# Altium PCB JacdacBrainRP2040 59.PcbDoc (part 1 of 2)
Units mm, origin at the board's own origin, x right, y up, seen from the top; angles counter-clockwise.
Board outline 24 x 39.85 mm, 2 copper layers (Top Layer, Bottom Layer), stack 1.525 mm thick; 58 components, 45 nets, 236 pads, 56 vias.
Unrouted connection lines stored in the file: 43.
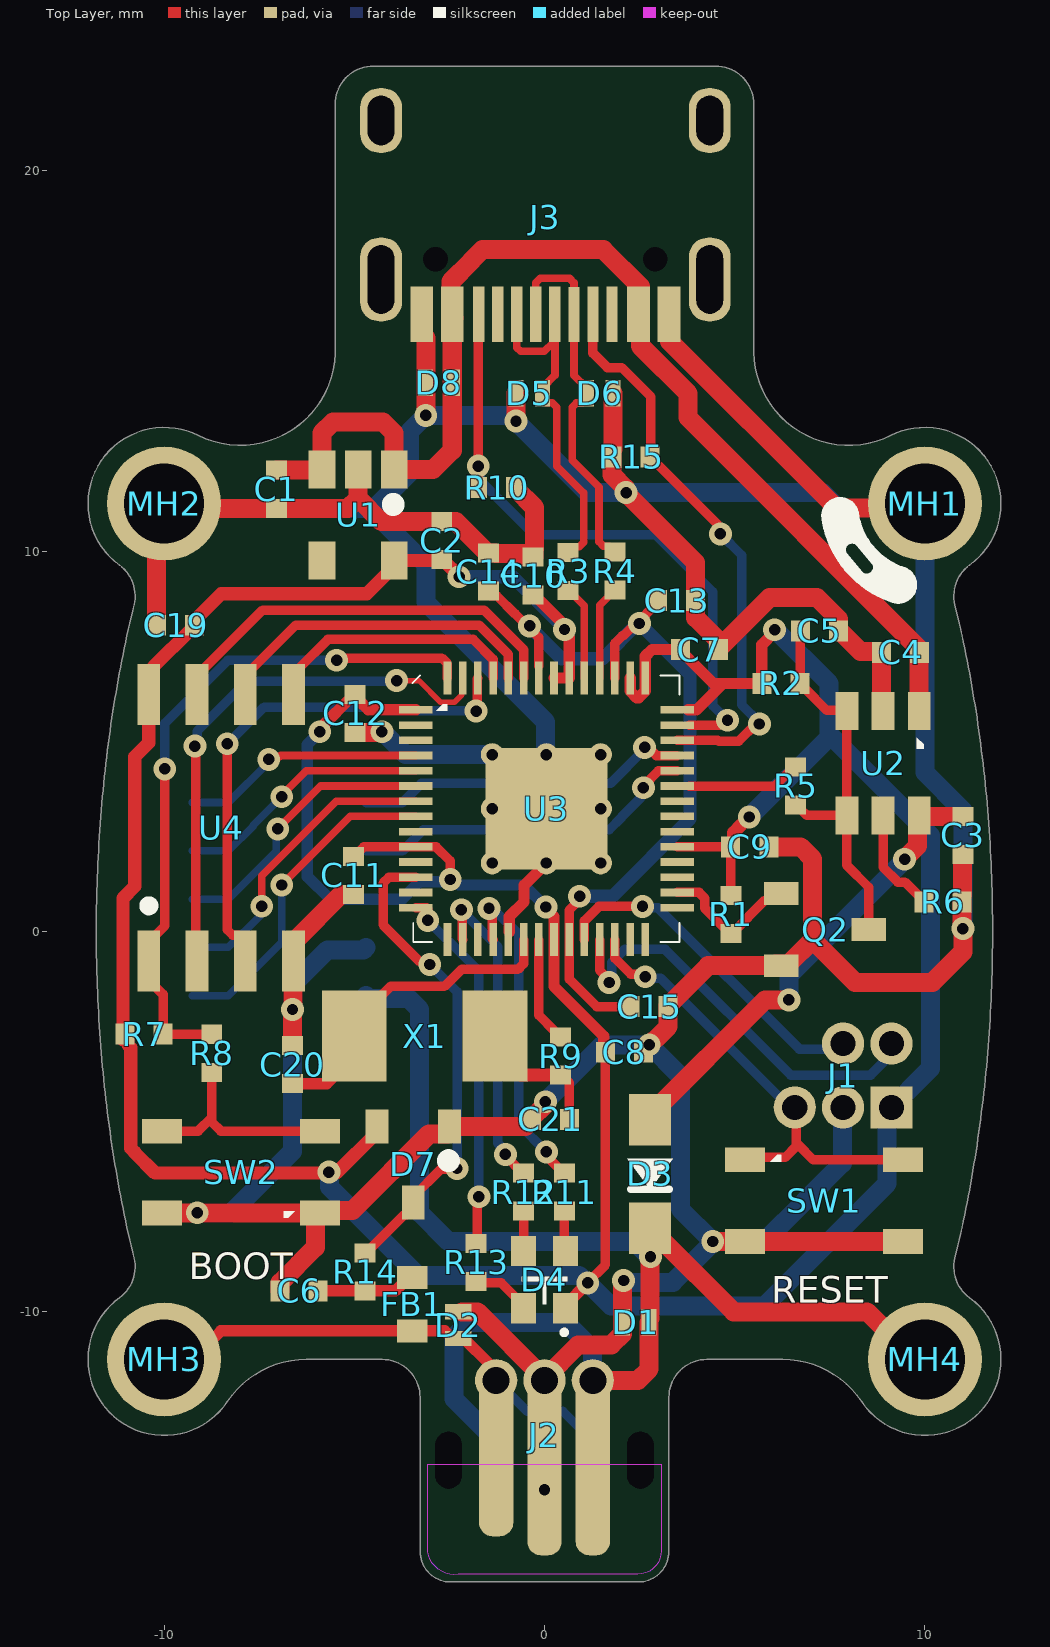
[diagram p0: Top Layer view]
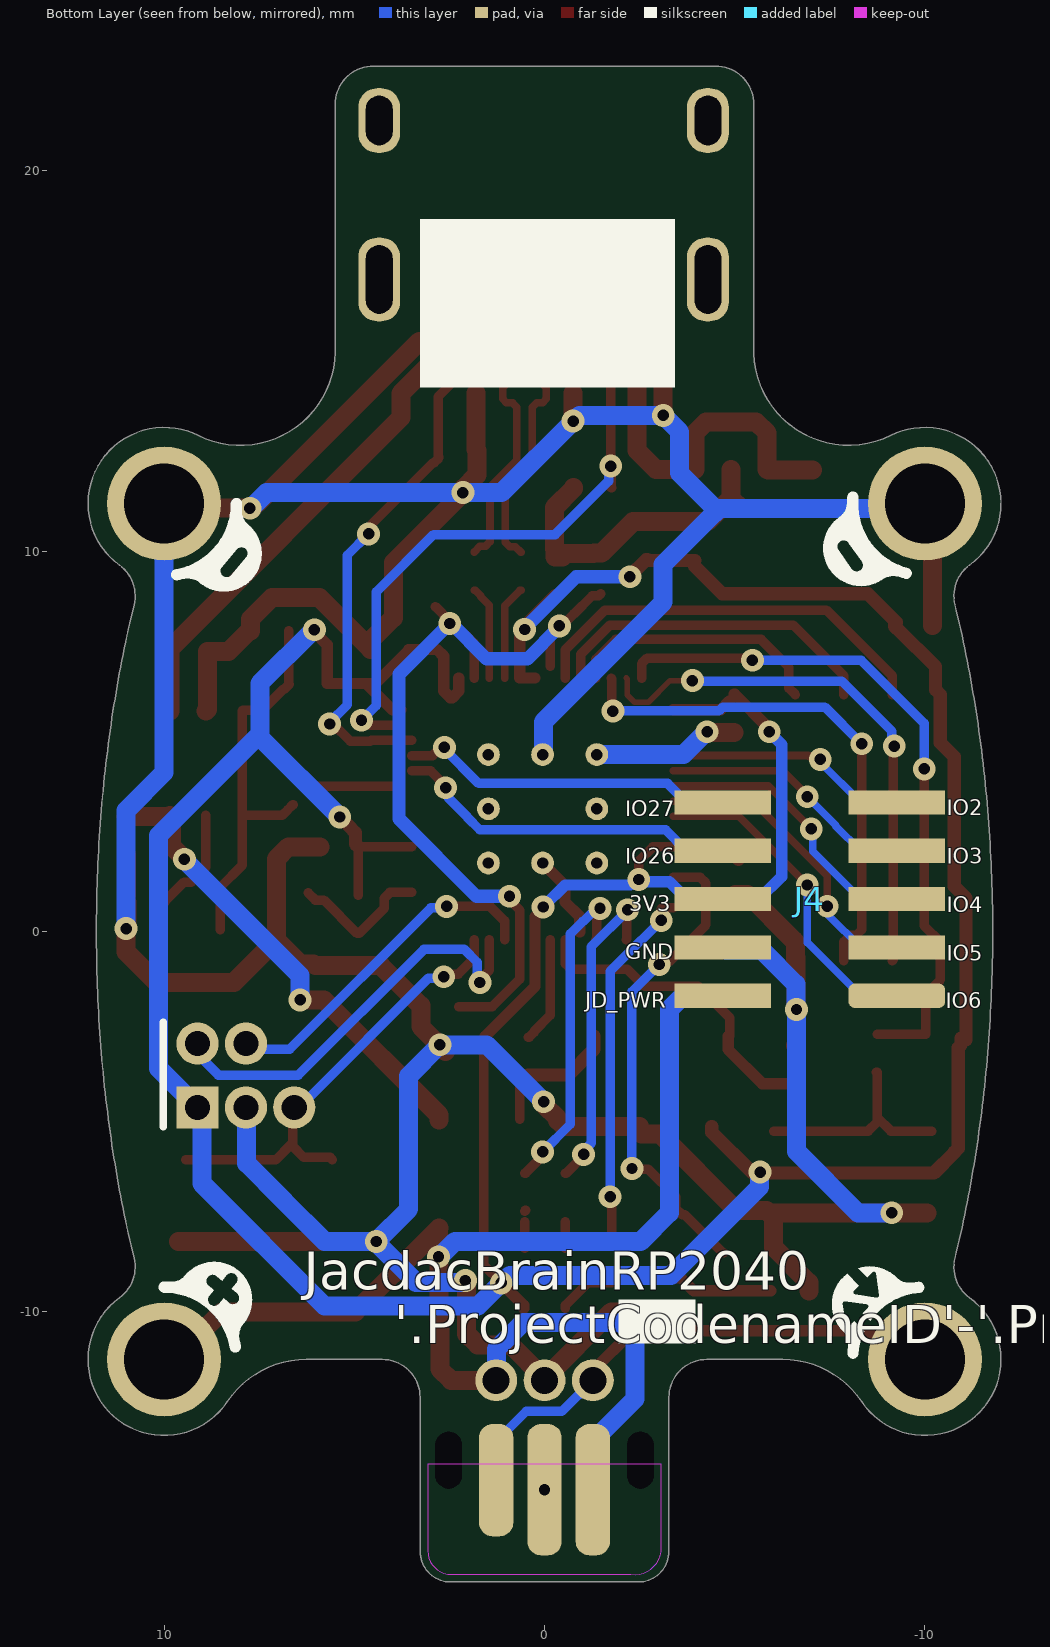
[diagram p1: Bottom Layer view, seen from below]

## Layer stack, top to bottom
Top Solder: solder mask 0.0102, Solder Resist, Dk 3.5
Top Layer: signal copper 0.0356
Dielectric 1: core 1.454, FR-4, Dk 4.2
Bottom Layer: signal copper 0.0356
Bottom Solder: solder mask 0.0102, Solder Resist, Dk 3.5

## Board outline
-11.636,-3.366 -11.65,-3.19 -11.664,-3.014 -11.678,-2.839 -11.69,-2.662 -11.702,-2.486 -11.713,-2.309 -11.723,-2.132 -11.732,-1.955 -11.74,-1.778 -11.748,-1.601 -11.755,-1.423 -11.761,-1.246 -11.766,-1.068 -11.771,-0.89 -11.777,-0.534 -11.779,-0.356 -11.78,-0.178 -11.781,0 -11.78,0.178 -11.779,0.356 -11.777,0.534 -11.771,0.89 -11.766,1.068 -11.761,1.246 -11.755,1.423 -11.748,1.601 -11.74,1.778 -11.732,1.955 -11.723,2.132 -11.713,2.309 -11.702,2.486 -11.69,2.662 -11.678,2.839 -11.664,3.014 -11.65,3.19 -11.636,3.366 -11.62,3.541 -11.603,3.716 -11.586,3.89 -11.568,4.064 -11.549,4.238 -11.53,4.411 -11.509,4.585 -11.488,4.757 -11.466,4.929 -11.444,5.101 -11.42,5.273 -11.396,5.444 -11.371,5.614 -11.345,5.784 -11.318,5.953 -11.291,6.122 -11.263,6.291 -11.234,6.459 -11.204,6.626 -11.174,6.793 -11.143,6.959 -11.111,7.124 -11.078,7.289 -11.045,7.453 -11.011,7.617 -10.976,7.78 -10.94,7.942 -10.904,8.104 -10.867,8.265 -10.829,8.425 -10.791,8.584 ccw(c-11.76,8.823) -11.175,9.631 cw(c-10,11.25) -9.875,13.246 ccw(c-9.803,14.281) -9.865,13.245 cw(c-10,11.25) -9.111,13.041 ccw(c-7.999,15.281) -5.5,15.2 ccw(c-7.439,15.229) -5.5,15.228 -5.5,21.75 cw(c-4.5,21.75) -4.5,22.75 4.5,22.75 cw(c4.5,21.75) 5.5,21.75 5.5,15.228 ccw(c7.999,15.281) 9.111,13.041 cw(c10,11.25) 9.865,13.245 ccw(c9.803,14.279) 9.875,13.246 cw(c10,11.25) 11.175,9.631 ccw(c11.76,8.823) 10.791,8.584 10.829,8.425 10.867,8.265 10.904,8.104 10.94,7.942 10.976,7.78 11.011,7.617 11.045,7.453 11.078,7.289 11.111,7.124 11.143,6.959 11.174,6.793 11.204,6.626 11.234,6.459 11.263,6.291 11.291,6.122 11.318,5.953 11.345,5.784 11.371,5.614 11.396,5.444 11.42,5.273 11.444,5.101 11.466,4.929 11.488,4.757 11.509,4.585 11.53,4.411 11.549,4.238 11.568,4.064 11.586,3.89 11.603,3.716 11.62,3.541 11.635,3.366 11.65,3.19 11.664,3.014 11.678,2.839 11.69,2.662 11.702,2.486 11.713,2.309 11.723,2.132 11.732,1.955 11.74,1.778 11.748,1.601 11.755,1.423 11.761,1.246 11.766,1.068 11.771,0.89 11.777,0.534 11.779,0.356 11.78,0.178 11.781,0 11.78,-0.178 11.779,-0.356 11.777,-0.534 11.771,-0.89 11.766,-1.068 11.761,-1.246 11.755,-1.423 11.748,-1.601 11.74,-1.778 11.732,-1.955 11.723,-2.132 11.713,-2.309 11.702,-2.486 11.69,-2.662 11.678,-2.839 11.664,-3.014 11.65,-3.19 11.635,-3.366 11.62,-3.541 11.603,-3.716 11.586,-3.89 11.568,-4.064 11.549,-4.238 11.53,-4.411 11.509,-4.585 11.488,-4.757 11.466,-4.929 11.444,-5.101 11.42,-5.273 11.396,-5.444 11.371,-5.614 11.345,-5.784 11.318,-5.953 11.291,-6.122 11.263,-6.291 11.234,-6.459 11.204,-6.626 11.174,-6.793 11.143,-6.959 11.111,-7.124 11.078,-7.289 11.045,-7.453 11.011,-7.617 10.976,-7.78 10.94,-7.942 10.904,-8.104 10.867,-8.265 10.829,-8.425 10.791,-8.584 ccw(c11.76,-8.823) 11.175,-9.631 cw(c10,-11.25) 8.337,-12.361 ccw(c6.258,-13.75) 6.258,-11.25 4.27,-11.25 ccw(c4.27,-12.25) 3.27,-12.25 3.27,-16.301 cw(c2.471,-16.301) 2.471,-17.1 -2.471,-17.1 cw(c-2.471,-16.301) -3.27,-16.301 -3.27,-12.25 ccw(c-4.27,-12.25) -4.27,-11.25 -6.258,-11.25 ccw(c-6.258,-13.75) -8.337,-12.361 cw(c-10,-11.249) -11.993,-11.082 cw(c-9.995,-11.253) -11.175,-9.631 ccw(c-11.76,-8.823) -10.791,-8.584 -10.829,-8.425 -10.867,-8.265 -10.904,-8.104 -10.94,-7.942 -10.976,-7.78 -11.011,-7.617 -11.045,-7.453 -11.078,-7.289 -11.111,-7.124 -11.143,-6.959 -11.174,-6.793 -11.204,-6.626 -11.234,-6.459 -11.263,-6.291 -11.291,-6.122 -11.318,-5.953 -11.345,-5.784 -11.371,-5.614 -11.396,-5.444 -11.42,-5.273 -11.444,-5.101 -11.466,-4.929 -11.488,-4.757 -11.509,-4.585 -11.53,-4.411 -11.549,-4.238 -11.568,-4.064 -11.586,-3.89 -11.603,-3.716 -11.62,-3.541

## Design rules (kind name [scope] priority, off if disabled: settings)
AssemblyTestPointUsage [All] p1: valid=2
BoardOutlineClearance [All] p1: gap=0.3 ignorepadtopadclearanceinfootprint=FALSE except(0: Arc-SplitContinuation Track-SplitContinuation SMDPad-SplitContinuation THPad-SplitContinuation Via-SplitContinuation Fill-SplitContinuation Poly-SplitContinuation Region-OutlineEdge Region-SplitContinuation Text-OutlineEdge Text-SplitContinuation; 0.25: THPad-OutlineEdge Poly-OutlineEdge)
Clearance [All] p1: gap=0.125 ignorepadtopadclearanceinfootprint=FALSE except(0: Arc-Hole Track-Hole SMDPad-Hole THPad-Hole Via-Hole Fill-Hole Poly-Hole Region-Hole Text-Hole)
ComponentClearance SpecialComponentClearance [InComponent('MH1') or InComponent('MH2')  or InComponent('MH3')  or InComponent('MH4') vs InComponent('J3') or InComponent('J4')  or InComponent('J6')  or InComponent('J7') or InComponent('J2') or InComponent('MH2') or InComponent('J1')] p1: gap=0 collisioncheckmode=3 verticalgap=0 showdistances=FALSE
ComponentClearance [All] p2: gap=0.2 collisioncheckmode=3 verticalgap=0.2 showdistances=FALSE
DiffPairsRouting DiffPair_DIFF90DiffPairsRouting [InDifferentialPairClass('DIFF90')] p1: maxlimit=2 minlimit=0.2 mostfreqgap=0.2 toplayer_minwidth=0.2 toplayer_maxwidth=2 toplayer_prefwidth=0.2 bottomlayer_minwidth=0.2 bottomlayer_maxwidth=2 bottomlayer_prefwidth=0.2 substack1={CB9D278B-8BF5-444A-AAF4-837A2A9DF42D} toplayer_{cb9d278b-8bf5-444a-aaf4-837a2a9df42d}_minwidth=0.381 toplayer_{cb9d278b-8bf5-444a-aaf4-837a2a9df42d}_maxwidth=0.381 toplayer_{cb9d278b-8bf5-444a-aaf4-837a2a9df42d}_prefwidth=0.381 bottomlayer_{cb9d278b-8bf5-444a-aaf4-837a2a9df42d}_minwidth=0.381 bottomlayer_{cb9d278b-8bf5-444a-aaf4-837a2a9df42d}_maxwidth=0.381 bottomlayer_{cb9d278b-8bf5-444a-aaf4-837a2a9df42d}_prefwidth=0.381 substack2={826B8647-A721-4255-895A-19F9591B9CD1} toplayer_{826b8647-a721-4255-895a-19f9591b9cd1}_minwidth=0.381 toplayer_{826b8647-a721-4255-895a-19f9591b9cd1}_maxwidth=0.381 toplayer_{826b8647-a721-4255-895a-19f9591b9cd1}_prefwidth=0.381 bottomlayer_{826b8647-a721-4255-895a-19f9591b9cd1}_minwidth=0.381 bottomlayer_{826b8647-a721-4255-895a-19f9591b9cd1}_maxwidth=0.381 bottomlayer_{826b8647-a721-4255-895a-19f9591b9cd1}_prefwidth=0.381 substack3={E64FCAF4-1BC8-437D-B1E0-0E5F2DC0F59E} toplayer_{e64fcaf4-1bc8-437d-b1e0-0e5f2dc0f59e}_minwidth=0.381 toplayer_{e64fcaf4-1bc8-437d-b1e0-0e5f2dc0f59e}_maxwidth=0.381 toplayer_{e64fcaf4-1bc8-437d-b1e0-0e5f2dc0f59e}_prefwidth=0.381 bottomlayer_{e64fcaf4-1bc8-437d-b1e0-0e5f2dc0f59e}_minwidth=0.381 bottomlayer_{e64fcaf4-1bc8-437d-b1e0-0e5f2dc0f59e}_maxwidth=0.381 bottomlayer_{e64fcaf4-1bc8-437d-b1e0-0e5f2dc0f59e}_prefwidth=0.381 substack4={E61CE66C-507C-4E1E-8E83-C905434AFC1C} toplayer_{e61ce66c-507c-4e1e-8e83-c905434afc1c}_minwidth=0.381 toplayer_{e61ce66c-507c-4e1e-8e83-c905434afc1c}_maxwidth=0.381 toplayer_{e61ce66c-507c-4e1e-8e83-c905434afc1c}_prefwidth=0.381 bottomlayer_{e61ce66c-507c-4e1e-8e83-c905434afc1c}_minwidth=0.381 bottomlayer_{e61ce66c-507c-4e1e-8e83-c905434afc1c}_maxwidth=0.381 bottomlayer_{e61ce66c-507c-4e1e-8e83-c905434afc1c}_prefwidth=0.381 filterlayerstackid={285EF71D-43CD-4455-94EE-AC1A71E951D2} maxuncoupledlength=12.7
FabricationTestPointUsage [All] p1: valid=2 allowmultiple=FALSE
HoleSize [All] p1: absolutevalues=TRUE maxlimit=2.54 minlimit=0.2 maxpercent=80.000 minpercent=20.000
MatchedLengths DiffPair_DIFF90MatchedLengths [InDifferentialPair ('USB_D')] p1: tolerance=25.4 checknetsindiffpair=FALSE checkdiffpairvsdiffpair=TRUE checkxsignals=TRUE checkothers=TRUE
MinimumSolderMaskSliver [All] p1: minsoldermaskwidth=0.005
PlaneClearance [All] p1: clearance=0.3
PlaneConnect [All] p1: planeconnectstyle=Relief reliefexpansion=0.5 reliefentries=4 reliefconductorwidth=0.2 reliefairgap=0.3
PolygonConnect "PolygonConnect GND" [isVIA] p1: connectstyle=Relief reliefconductorwidth=0.2 reliefentries=4 polygonreliefangle="90 Angle" airgapwidth=0.2
PolygonConnect [All] p2: connectstyle=Relief reliefconductorwidth=0.2 reliefentries=4 polygonreliefangle="90 Angle" airgapwidth=0.2
RoutingVias [All] p1: holewidth=0.3 width=0.6 viastyle="Through Hole" minholewidth=0.3 minwidth=0.6 maxholewidth=0.3 maxwidth=0.8
SilkToSilkClearance [All] p1: silktosilkclearance=0.001
SilkToSolderMaskClearance [IsPad] p1: minsilkscreentomaskgap=0.05 clearancetoexposedcopper=TRUE
SolderMaskExpansion [All] p1: expansion=0.075 istentingtop=FALSE
Width [All] p1: maxlimit=2 minlimit=0.15 preferedwidth=0.15 substack1={CB9D278B-8BF5-444A-AAF4-837A2A9DF42D} substack2={826B8647-A721-4255-895A-19F9591B9CD1} substack3={E64FCAF4-1BC8-437D-B1E0-0E5F2DC0F59E} substack4={E61CE66C-507C-4E1E-8E83-C905434AFC1C} minimp=50.000000 maximp=50.000000 favimp=50.000000
20 further rules are at their usual default settings.

## Classes and differential pairs
differential pair USB_D: +USB_D_P -USB_D_N
differential pair MCU_USB_D: +MCU_USB_D_P -MCU_USB_D_N

## Components (designator, comment, footprint, x,y, rotation, side; value= is the part's Value field where it differs from the comment)
C1 "CL05A105KP5NNNC" "C0402_0.55MM - without outline" -7.05,11.625 r90 top
C2 "CL05A105KP5NNNC" "C0402_0.55MM - without outline" -2.7,10.275 r270 top
C3 "CL05A475MP5NRNC" "R0402 - Without outline" 11,2.525 r90 top
C4 "CL05A475MP5NRNC" "R0402 - Without outline" 9.36,7.338 r0 top
C5 "CL05A475MP5NRNC" "R0402 - Without outline" 7.225,7.9 r180 top
C6 "CL05C330JB51PNC" "C0402_0.55MM - without outline" -6.45,-9.45 r0 top
C7 "CL05A105KP5NNNC" "C0402_0.55MM - without outline" 4.075,7.412 r180 top
C8 "CL05A105KP5NNNC" "C0402_0.55MM - without outline" 2.1,-3.175 r180 top
C9 "CL05A105KP5NNNC" "C0402_0.55MM - without outline" 5.396,2.223 r180 top
C10 "CL05A105KP5NNNC" "C0402_0.55MM - without outline" -0.3,9.35 r270 top
C11 "CL05A105KP5NNNC" "C0402_0.55MM - without outline" -5.025,1.475 r90 top
C12 "CL05A105KP5NNNC" "C0402_0.55MM - without outline" -4.98,5.733 r90 top
C13 "CL05A105KP5NNNC" "C0402_0.55MM - without outline" 3.475,8.7 r180 top
C14 "CL05A105KP5NNNC" "C0402_0.55MM - without outline" -1.475,9.45 r270 top
C15 "CL05A105KP5NNNC" "C0402_0.55MM - without outline" 2.75,-1.975 r180 top
C19 "CL05A105KP5NNNC" "C0402_0.55MM - without outline" -9.7,8.05 r0 top
C20 "CL05C150JB5NNNC" "C0402_0.55MM - without outline" -6.625,-3.5 r90 top
C21 "CL05C150JB5NNNC" "C0402_0.55MM - without outline" 0.156,-4.938 r180 top
D1 "RCLAMP0521P-N" "TVS 0402 - L" 2.4,-10.275 r180 top
D2 "RCLAMP0521P-N" "TVS 0402 - L" -2.27,-10.35 r90 top
D3 "RB161MM-20TR" SOD-123F 2.775,-6.375 r90 top
D4 "TZ-P4-1615RGBTCA1-0.55T" TZ-P4-1615RGBTCA1-0.55T 0,-9.15 r90 top
D5 "RCLAMP0521P-N" "TVS 0402 - L" -0.4,14.15 r180 top
D6 "RCLAMP0521P-N" "TVS 0402 - L" 1.45,14.15 r0 top
D7 "BAT54S" "NXP-BAT54S-TO-236AB - WITHOUT OUTLINE" -3.45,-6.125 r270 top
D8 "RCLAMP0521P-N" "TVS 0402 - L" -2.775,14.425 r180 top
FB1 "TDK MPZ1608S102ATA00" "TDK MPZ1608 0.8mm - without outline" -3.475,-9.8 r90 top
J1 "Hack Connect Mini 1.27 mm pitch 2-row" HACK_CONNECT_MINI_5_X_1_27 9.12,-4.625 r90 top
J2 "3 pin JACDAC edge connector" JACDAC_EDGE_CONNECTOR_NO_TRACES 0,-11.25 r180 top
J3 "TYPE-C-31-M-12" TYPE-C-31-M-12 0.025,16.225 r180 top
J4 "SHF-105-01-L-D-SM-whitesch" "Samtec SHF-105-01-L-D-SM - NO SILKSCREEN" -6.975,0.85 r0 bottom
MH1 "MH_5.0MMK_3.0MMC_2.1MMD_PTH" MH_5.0MMK_3.0MMC_2.1MMD_PTH 10,11.25 r0 top
MH2 "MH_5.0MMK_3.0MMC_2.1MMD_PTH" MH_5.0MMK_3.0MMC_2.1MMD_PTH -10,11.25 r180 top
MH3 "MH_5.0MMK_3.0MMC_2.1MMD_PTH" MH_5.0MMK_3.0MMC_2.1MMD_PTH -10,-11.25 r180 top
MH4 "MH_5.0MMK_3.0MMC_2.1MMD_PTH" MH_5.0MMK_3.0MMC_2.1MMD_PTH 10,-11.25 r0 top
Q2 "2N7002K-T1-GE3" "SOT-23-3 (TO-236)" 7.375,0.05 r0 top
R1 "" "R0402 - Without outline" 4.9,0.45 r270 top
R2 "RC0402FR-07330KL" "R0402 - Without outline" 6.212,6.52 r0 top
R3 "RC0402FR-0727RL" "R0402 - Without outline" 0.618,9.468 r90 top
R4 "RC0402FR-0727RL" "R0402 - Without outline" 1.85,9.475 r90 top
R5 "RC0402FR-07150RL" "R0402 - Without outline" 6.6,3.825 r270 top
R6 "RC0402FR-0752K3L" "R0402 - Without outline" 10.475,0.775 r180 top
R7 "10k" "R0402 - Without outline" -10.525,-2.7 r0 top
R8 "RC0402FR-071KL" "R0402 - Without outline" -8.747,-3.202 r270 top
R9 "RC0402FR-071KL" "R0402 - Without outline" 0.425,-3.275 r90 top
R10 "RC0402JR-075K1L" "R0402 - Without outline" -1.259,11.666 r0 top
R11 "RC0402FR-0730RL" "R0402 - Without outline" 0.525,-6.85 r90 top
R12 "RC0402FR-0730RL" "R0402 - Without outline" -0.55,-6.85 r90 top
R13 "RC0402FR-07150RL" "R0402 - Without outline" -1.8,-8.7 r90 top
R14 "RC0402FR-07220RL" "R0402 - Without outline" -4.715,-8.95 r270 top
R15 "RC0402JR-075K1L" "R0402 - Without outline" 2.275,12.475 r180 top
SW1 "UK-B0267-SP25Y" USAKRO-UK-B0267-SP25Y 7.35,-7.075 r0 top
SW2 "UK-B0267-SP25Y" USAKRO-UK-B0267-SP25Y -7.975,-6.325 r180 top
U1 "ME6211C33M5G-N" MICRONE-SOT23-5 -4.9,10.95 r270 top
U2 "TPS2553DBVR" "TI-TPS2553 - without_outline" 8.9,4.425 r270 top
U3 "RP2040" RP2040 0.05,3.225 r0 top
U4 "" 8-SOIC -8.5,2.725 r90 top
X1 "12MHz" SMD-5032_2P -3.15,-2.75 r180 top

## Footprints (in the part's own frame and the unit in brackets; to place one, negate y for a bottom-side part, rotate by r counter-clockwise, add the part's x,y. Pads: shape width x height; smd on the part's side, far side on the other; paste and mask are expansions set on the pad)
8-SOIC [mm] "0.209\", 5.30mm Width"
  rect 1.6x0.6 smd: 1(-3.5,1.905) 2(-3.5,0.635) 3(-3.5,-0.635) 4(-3.5,-1.905) 5(3.5,-1.905) 6(3.5,-0.635) 7(3.5,0.635) 8(3.5,1.905)
  silkscreen extent -2.15,1.8 -1.95,2, body extent -3.95,-2.64 3.95,2.64, height 1
"C0402_0.55MM - without outline" [mm]
  rect 0.5x0.55 smd: 1(-0.5,0) 2(0.5,0)
  body extent -0.5,-0.25 0.5,0.25, height 0.55
HACK_CONNECT_MINI_5_X_1_27 [mm]
  rect 1.11x1.11 hole 0.66: 1(0,0)
  round 1.11 hole 0.66: 2(1.676,0) 3(0,1.27) 4(1.676,1.27) 5(0,2.54)
JACDAC_EDGE_CONNECTOR_NO_TRACES [mm] "JacDac 3 pin connector with no traces"
  rrect78% 0.9x2.95 smd far side paste-1 mask+0: 1(-1.27,3.175)
  rrect78% 0.9x4.3 smd paste-1 mask+0: 1(1.27,2.5)
  round 1.11 / inner round 0.71 / far side round 1.1 hole 0.71 paste-0.254 mask+0: 1(1.27,0.55) 2(0,0.55) 3(-1.27,0.55)
  rrect78% 0.9x3.45 smd far side paste-1 mask+0: 2(0,3.425) 3(1.27,3.425)
  rrect78% 0.9x4.8 smd paste-1 mask+0: 2(0,2.75) 3(-1.27,2.75)
  round 0 hole 0.7 slot 1.5 at 90 deg unplated: ""(-2.52,2.65) ""(2.52,2.65)
  Top Layer keep-out region: -3.075,2.75 -3.07,5.033 -2.987,5.341 -2.761,5.567 -2.453,5.65 -2.453,5.65 2.27,5.65 2.545,5.635 2.794,5.516 2.978,5.31 3.07,5.05 3.07,5.05 3.07,2.75
  Bottom Layer lines w0.2: -1.126,0.85 -1.27,0.85
  Bottom Layer keep-out region: -3.07,2.75 -3.07,5.033 -3.023,5.269 -2.889,5.469 -2.689,5.603 -2.453,5.65 -2.453,5.65 2.27,5.65 2.545,5.635 2.794,5.516 2.978,5.31 3.07,5.05 3.07,5.05 3.07,2.75
MH_5.0MMK_3.0MMC_2.1MMD_PTH [mm] "Mounting Hole 5.0mm clearance, 3.1 annualar ring and 2.1mm PTH"
  round 3 hole 2.1 mask+0.05: 1(0,0)
MICRONE-SOT23-5 [mm]
  rect 1x0.7 smd: 1(-1.2,0.95) 2(-1.2,0) 3(-1.2,-0.95) 4(1.2,-0.95) 5(1.2,0.95)
  silkscreen extent -0.32,0.88 -0.23,0.97, body extent -1.32,-1.5 1.32,1.5, height 1.11
"NXP-BAT54S-TO-236AB - WITHOUT OUTLINE" [mm] "SOT23, 3-Leads, Body 2.90x2.30mm, Pitch 0.95mm, IPC Medium Density"
  rect 0.9x0.6 smd: 1(-1,0.95) 2(-1,-0.95) 3(1,0)
  silkscreen extent -0.15,0.88 -0.05,0.97, body extent -1.32,-1.5 1.32,1.5, height 1.12
"R0402 - Without outline" [mm]
  rect 0.5x0.55 smd: 1(-0.5,0) 2(0.5,0)
  body extent -0.5,-0.25 0.5,0.25, height 0.35
RP2040 [mm] "QFN-56_7x7"
  rect 0.875x0.2 smd mask+0.051: 1(-3.437,2.6) 2(-3.437,2.2) 3(-3.437,1.8) 4(-3.437,1.4) 5(-3.437,1) 6(-3.437,0.6) 7(-3.437,0.2) 8(-3.437,-0.2) 9(-3.437,-0.6) 10(-3.437,-1) 11(-3.437,-1.4) 12(-3.437,-1.8) 13(-3.437,-2.2) 14(-3.437,-2.6) 29(3.437,-2.6) 30(3.437,-2.2) 31(3.437,-1.8) 32(3.437,-1.4) 33(3.437,-1) 34(3.437,-0.6) 35(3.437,-0.2) 36(3.437,0.2) 37(3.437,0.6) 38(3.437,1) 39(3.437,1.4) 40(3.437,1.8) 41(3.437,2.2) 42(3.437,2.6)
  rect 0.2x0.875 smd mask+0.051: 15(-2.6,-3.437) 16(-2.2,-3.437) 17(-1.8,-3.437) 18(-1.4,-3.437) 19(-1,-3.437) 20(-0.6,-3.437) 21(-0.2,-3.437) 22(0.2,-3.437) 23(0.6,-3.437) 24(1,-3.437) 25(1.4,-3.437) 26(1.8,-3.437) 27(2.2,-3.437) 28(2.6,-3.437) 43(2.6,3.437) 44(2.2,3.437) 45(1.8,3.437) 46(1.4,3.437) 47(1,3.437) 48(0.6,3.437) 49(0.2,3.437) 50(-0.2,3.437) 51(-0.6,3.437) 52(-1,3.437) 53(-1.4,3.437) 54(-1.8,3.437) 55(-2.2,3.437) 56(-2.6,3.437)
  round 0.6 hole 0.3 paste-0.6 mask-0.6: 57(-1.425,-1.425) 57(-1.425,0) 57(-1.425,1.425) 57(0,-1.425) 57(0,1.425) 57(1.425,-1.425) 57(1.425,0) 57(1.425,1.425)
  rect 3.2x3.2 smd paste-3.2 mask+0.051: 57(0,0)
  silkscreen extent -3.52,-3.5 3.5,3.5, body extent -3.51,-3.5 3.5,3.5, height 0.89
"Samtec SHF-105-01-L-D-SM - NO SILKSCREEN" [mil]
  rrect50% 100x25 smd: 1(-90,100)
  rect 100x25 smd: 2(90,100) 3(-90,50) 4(90,50) 5(-90,0) 6(90,0) 7(-90,-50) 8(90,-50) 9(-90,-100) 10(90,-100)
  body extent -126,-250 114,250, height 215
SMD-5032_2P [mm] "12MHz ±30ppm 12pF 50O"
  rect 1.7x2.4 smd: 1(-1.85,0) 2(1.85,0)
  body extent -2.5,-1.6 2.5,1.6, height 1.2
SOD-123F [mm] "SODFL, 2-Leads, Body 1.65x3.60mm, IPC Medium Density"
  rect 1.35x1.1 smd: 1(-1.425,0) 2(1.425,0)
  silkscreen extent -0.4,-0.6 0.4,0.6, body extent -1.73,-0.82 1.72,0.82, height 0.95
"SOT-23-3 (TO-236)" [mm] "SOT23, 3-Leads, Body 2.90x2.30mm, Pitch 0.95mm, IPC Medium Density"
  rect 0.9x0.6 smd: 1(-1.15,0.95) 2(-1.15,-0.95) 3(1.15,0)
  body extent -1.32,-1.5 1.32,1.5, height 1.12
"TDK MPZ1608 0.8mm - without outline" [mm]
  rect 0.6x0.8 smd: 1(-0.7,0) 2(0.7,0)
  body extent -0.8,-0.4 0.8,0.4, height 0.8
"TI-TPS2553 - without_outline" [mm] "SOT23, 6-Leads, Body 2.90x2.80mm, Pitch 0.95mm, IPC Medium Density"
  rect 1x0.6 smd: 1(-1.375,0.95) 2(-1.375,0) 3(-1.375,-0.95) 4(1.375,-0.95) 5(1.375,0) 6(1.375,0.95)
  silkscreen extent -0.67,0.89 -0.38,1.06, body extent -1.52,-1.52 1.53,1.53, height 1.1
"TVS 0402 - L" [mm] "TVS 0402 RoHS"
  rect 0.4x0.7 smd paste-0.038 mask+0.05: 1(-0.35,0) 2(0.35,0)
  body extent -0.5,-0.3 0.5,0.3, height 0.5
TYPE-C-31-M-12 [mm] "USB - Type C Female 16 8.94*7.3mm USB Connectors RoHS"
  rrect90% 1.1x2.2 hole 0.7 slot 1.8 at 90 deg: 1(-4.32,-0.915) 4(4.32,-0.915)
  rrect90% 0x0 hole 0.65 unplated: 1(-2.89,-1.445)
  round 0 hole 0.65 unplated: 1(2.89,-1.445)
  rrect90% 1.1x1.7 hole 0.7 slot 1.3 at 90 deg: 2(-4.32,-5.095) 3(4.32,-5.095)
  rect 0.3x1.45 smd paste-0.254 mask+0.05: A1(-3.4,0)
  rect 0.3x1.45 smd mask+0.05: A4(-2.6,0) A5(-1.25,0) A6(-0.25,0) A7(0.25,0) A8(1.25,0) A9(2.6,0) A12(3.4,0) B1(3.1,0) B4(2.3,0) B5(1.75,0) B6(0.75,0) B7(-0.75,0.006) B8(-1.75,0) B9(-2.3,0) B12(-3.1,0)
  body extent -4.47,-7.7 4.47,0.21, height 3.31
TZ-P4-1615RGBTCA1-0.55T [mm] "1615 Light Emitting Diodes (LED) RoHS"
  rect 0.8x0.65 smd mask+0.05: 1(-0.75,-0.55) 2(-0.75,0.55) 3(0.75,0.55) 4(0.75,-0.55)
  silkscreen extent -1.44,-0.6 0.07,0.6, body extent -0.8,-0.75 0.8,0.75, height 0.55
USAKRO-UK-B0267-SP25Y [mm] "4.20mm x 3.20mm"
  rect 1.05x0.65 smd: 1(-2.075,1.075) 2(2.075,1.075) 3(-2.075,-1.075) 4(2.075,-1.075)
  silkscreen extent -1.41,1.02 -1.12,1.2, body extent -2.29,-1.6 2.29,1.6, height 2.5

## Part data
C1 C2 C7 C8 C9 C10 C11 C12 C13 C14 C15 C19: "CAP CER 1UF 10V X5R 0402", Capacitance=1µF, Case Code (Imperial)=0402, Case Code (Metric)=1005, Dielectric=X5R, Manufacturer=Samsung, Max Operating Temperature=85°C, Min Operating Temperature=-55°C, Package Quantity=1, Supplier Part Number 1=1276-1076-1-ND, Tolerance=10%, Voltage Rating=10V, Case/Package=0402, Category=Capacitors, Checked=?, ComponentLink1Description="Online datasheet", ComponentLink1URL=https://datasheet.ciiva.com/15195/getdatasheetpartid-358390-15195630.pdf, Contact Plating=Tin, Created=DG, Depth=0.5mm, Height=0.5mm, Length=1mm, Manufacturer Part Number=CL05A105KP5NNNC, Material=Ceramic, Mount="Surface Mount", Packaging="Tape and Reel", Pricing 1="1=0.10000, 10=0.03900, 50=0.02100, 100=0.01720, 500=0.01228, 1000=0.00965, 2500=0.00877, 5000=0.00807 (USD)", Pricing 2="1=0.10000, 10=0.04200, 100=0.01800, 500=0.01300, 1000=0.01000, 2500=0.00900 (USD)", Pricing 3="10=0.02450, 100=0.02000, 500=0.01310, 2500=0.00920, 5000=0.00810, 10000=0.00640, 50000=0.00490 (GBP)", Radiation Hardening=No, RoHS=Yes, Stock 1=5705569, Stock 2=928941, Stock 3=53670, Supplier 1=Digi-Key, Supplier 2=Mouser, Supplier 3=Farnell, Supplier Part Number 2=187-CL05A105KP5NNNC, Supplier Part Number 3=3013329, Thickness=0.022inch, Width=0.02inch
C3 C4 C5: "CAP CER 4.7UF 10V X5R 0402", Capacitance=4.7uF, Case Code (Imperial)=0402, Case Code (Metric)=1005, Dielectric=X5R, Manufacturer=Samsung, Max Operating Temperature=85°C, Min Operating Temperature=-55°C, Package Quantity=10000, Supplier Part Number 1=1276-1482-2-ND, Tolerance=20%, Voltage Rating=10V, Case/Package=0402, Category="Ceramic Capacitors", Checked By=?, ComponentLink1Description="Online datasheet", ComponentLink1URL=https://datasheet.ciiva.com/25786/cl05a475mp5nrnc-25786963.pdf, Created By="D. Gakure", Lead Free="Lead Free", Length=0.039inch, Manufacturer Part Number=CL05A475MP5NRNC, Mount="Surface Mount", Packaging="Tape and Reel", Pricing 1="10000=0.01405, 20000=0.01338 (USD)", Pricing 2="1=0.23500, 500=0.03970, 1500=0.02900, 2500=0.02500, 5000=0.02050 (USD)", RoHS=Yes, RoHS Compliant=Yes, Series=CL, Stock 1=840000, Stock 2=2004, Supplier 1=Digi-Key, Supplier 2="Future Electronics", Supplier Part Number 2=2103694, Thickness=0.022inch, Width=0.02inch
C6: "CAP CER 33PF 50V NP0 0402", Capacitance=33pF, Case Code (Imperial)=0402, Case Code (Metric)=1005, Manufacturer=Samsung, Max Operating Temperature=125°C, Min Operating Temperature=-55°C, Ratings=AEC-Q200, Supplier Part Number 1=1276-6515-1-ND, Tolerance=5%, Voltage Rating=50V, Case/Package=0402, Category=Capacitors, Checked=?, ComponentLink1Description="Samsung datasheet online", ComponentLink1URL=http://www.samsungsem.com/kr/support/library/product-catalog/mlcc.jsp, Created=DG, Lead Free="Lead Free", Length=0.039inch, Manufacturer Part Number=CL05C330JB51PNC, Mount="Surface Mount", Packaging="Tape and Reel", Pricing 1="1=0.10000, 10=0.07500, 50=0.04060, 100=0.03320, 500=0.02374, 1000=0.01865, 2500=0.01696, 5000=0.01560 (USD)", Pricing 2="1=0.11000, 10=0.08200, 100=0.03600, 500=0.02600, 1000=0.02000, 2500=0.01800 (USD)", Pricing 3="10000=0.00780 (USD)", RoHS=Yes, Stock 1=250654, Stock 2=97900, Stock 3=100000, Supplier 1=Digi-Key, Supplier 2=Mouser, Supplier 3="Future Electronics", Supplier Part Number 2=187-CL05C330JB51PNC, Supplier Part Number 3=6022520, Thickness=0.022inch, Width=0.02inch
C20 C21: "CAP CER 15PF 50V C0G/NP0 0402", Capacitance=15pF, Case Code (Imperial)=0402, Case Code (Metric)=1005, Dielectric=C0G, Manufacturer=Samsung, Max Operating Temperature=125°C, Min Operating Temperature=-55°C, Package Quantity=1, Supplier Part Number 1=1276-1179-1-ND, Temperature Coefficient=300ppm/°C, Tolerance=5%, Voltage=50V, Case/Package=0402, Category="Ceramic Capacitors", ComponentLink1Description="Online datasheet", ComponentLink1URL=https://datasheet.ciiva.com/15195/getdatasheetpartid-497170-15195669.pdf, Construction=Flat, Contact Plating=Tin, Depth=0.5mm, Height=0.5mm, Length=1mm, Manufacturer Part Number=CL05C150JB5NNNC, Material=Ceramic, Mount="Surface Mount", Packaging="Tape and Reel", Pricing 1="1=0.10000, 10=0.02600, 50=0.01440, 100=0.01180, 500=0.00842, 1000=0.00661, 2500=0.00601, 5000=0.00553 (USD)", Pricing 2="1=0.10000, 10=0.01400, 50=0.01400, 100=0.01200, 1000=0.00700, 10000=0.00500 (USD)", Radiation Hardening=No, RoHS=Yes, RoHS Compliant=Yes, Series=CL, Stock 1=822355, Stock 2=313617, Supplier 1=Digi-Key, Supplier 2=Mouser, Supplier Part Number 2=187-CL05C150JB5NNNC, Thickness=0.022inch, Voltage Rating=50V, Width=0.02inch
D1 D2 D5 D6 D8: "Bidirectional 5V (Max) 6V 16V 3.5A (8/20us) 0402 TVS RoHS", Manufacturer="Born Semiconductor", Package=0402, Supplier1 Part Number=C316043, Checked By=?, ComponentLink1Description="Online datasheet", ComponentLink1URL=https://datasheet.lcsc.com/szlcsc/Bourne-Semicon-Shenzhen-RCLAMP0521P-N_C316043.pdf, Created By="D Gakure", Manufacturer Part Number=RCLAMP0521P-N, Supplier1=LCSC
D3: "ROHM - RB161MM-20TR - Schottky-Gleichrichterdiode, 20 V, 1 A, Einfach, SOD-123FL, 2 Pin(s), 350 mV", Average Rectified Current=1A, Case/Package=SOD, Manufacturer=Rohm, Max Operating Temperature=125°C, Max Reverse Voltage (DC)=25V, Supplier Part Number 1=RB161MM-20TR-ND, Category="Rectifier Diodes", ComponentLink1Description="Online datasheet", ComponentLink1URL=http://www.mouser.com/ds/2/348/rb161mm-20tr-e-1138856.pdf, Manufacturer Part Number=RB161MM-20TR, Mount="Surface Mount", Number of Pins=2, Packaging="Tape and Reel", Pricing 1="3000=0.09900, 6000=0.09350, 15000=0.08525, 30000=0.07975, 75000=0.07500 (USD)", Pricing 2="30=0.29200, 150=0.15800, 300=0.15300, 750=0.14900, 1500=0.14500 (USD)", Pricing 3="1=0.33000, 10=0.25100, 50=0.25100, 100=0.12500, 1000=0.10000, 10000=0.07600 (USD)", RoHS=Yes, RoHS Compliant=Yes, Stock 2=1, Supplier 1=Digi-Key, Supplier 2=RSComponents, Supplier 3=Mouser, Supplier Part Number 2=1246775, Supplier Part Number 3=755-RB161MM-20TR
D4: "1615 Light Emitting Diodes (LED) RoHS", Manufacturer=TUOZHAN, Package=1615, Supplier 1 Part Number=C779813, Category=Optoelectronics, Checked By=?, ComponentLink1Description="Online datasheet", ComponentLink1URL=https://datasheet.lcsc.com/szlcsc/2009041238_TUOZHAN-TZ-P4-1615RGBTCA1-0-55T_C779813.pdf, Created By="D. Gakure", Manufacturer Part Number=TZ-P4-1615RGBTCA1-0.55T, Packaging="Tape & Reel (TR)", RoHS="RoHS Compliant", Size / Dimension=1.6x1.5mm, Supplier 1=LCSC
D7: "DIODE ARRAY SCHOTTKY 30V SOT23", Manufacturer=Nexperia, Manufacturer Part Number=BAT54S,235, Supplier Part Number 1=1727-1868-1-ND, Category="Rectifier Diodes", ComponentLink1Description="NXP datasheet online", ComponentLink1URL=https://assets.nexperia.com/documents/data-sheet/BAT54_SER.pdf, Pricing 1="1=0.13000, 10=0.11900, 100=0.05610, 500=0.03326, 1000=0.02185, 5000=0.02138 (USD)", RoHS=No, Stock 1=14011, Supplier 1=Digi-Key, Supplier 2=Mouser, Supplier 3=RSComponents, Supplier Part Number 2=771-BAT54S235, Supplier Part Number 3=1707990
FB1: "0603 1k@100MHz 0.8A chip", Case Code (Imperial)=0603, Case Code (Metric)=1608, Current Rating=800mA, DC Resistance (DCR)=300mR, Manufacturer=TDK, Manufacturer Part Number=MPZ1608S102ATA00, Package Quantity=4000, Supplier Part Number 1=445-8694-1-ND, Tolerance=25%, Case/Package=0603, ComponentLink2Description="datasheet online", ComponentLink2URL=https://www.mouser.co.uk/datasheet/2/400/eads_commercial_power_mpz1608_en-923650.pdf, ComponentLink3Description=datasheet, ComponentLink3URL="Y:\System\Altium\Libraries 2014\TDK\Datasheets\eads_commercial_power_mpz1608_en-923650.pdf", Core Material=Ferrite, Height=0.037inch, Impedance="1kR @ 100MHz", Length=0.063inch, Max DC Current=800mA, Mount="Surface Mount", Packaging="Tape and Reel", Pricing 1="1=0.1, 10=0.079, 25=0.0716, 50=0.0644, 100=0.0472, 250=0.03432, 500=0.03146, 1000=0.02717 (USD)", Stock 1=113542, Supplier 1=Digi-Key, Supplier 2=Mouser, Supplier Part Number 2=810-MPZ1608S102ATA00, Width=0.031inch
J1: library part HACK_CONNECT_MINI
J2: library part "Jacdac edge connector", "3 pin Jacdac edge connector 1.27mm pitch", Manufacturer Part Number=JACDAC_EDGE_CONNECTOR, Checked By=?, ComponentLink1Description="Yuliang JACDAC cable connector drawing online", ComponentLink1URL=https://github.com/microsoft/jacdac-mdk/blob/main/connector/JACDAC-Connector-by-Yuliang-2020-11-28.pdf, ComponentLink2Description="JACDAC PCB edge connector spec onlin", ComponentLink2URL=https://github.com/microsoft/jacdac-mdk/blob/main/connector/JACDAC_PCB_Edge_Connector_Drawing_JD-PEC-01_rev_01.pdf, Created By="D. Gakure", PCB Type="1.6mm FR4"
J3: "USB - Type C Female 16 USB Connectors RoHS", Manufacturer="Korean Hroparts Elec", Supplier 1 Part Number=C165948, Category="USB Connectors", ComponentLink1Description="Online datasheet", ComponentLink1URL=https://datasheet.lcsc.com/szlcsc/1811131825_Korean-Hroparts-Elec-TYPE-C-31-M-12_C165948.pdf, Gender=Receptacle, Manufacturer Part Number=TYPE-C-31-M-12, Number of Positions=16, Orientation="Right Angle", RoHS=Yes, Supplier 1=LCSC
J4: "Standard Card Edge Connectors .050 Mini Edge Card Connector, Vertical", Housing Color=Black, Manufacturer=Samtec, Manufacturer Part Number=SHF-105-01-L-D-SM, Max Operating Temperature=125°C, Min Operating Temperature=-55°C, Category="Card Edge Connectors", ComponentLink1Description="samtec datasheet online", ComponentLink1URL=http://www.farnell.com/datasheets/1927736.pdf?src-supplier=Avnet, ComponentLink2Description="samtec datasheet", ComponentLink2URL="Y:\System\Altium\Libraries 2014\Samtec", ComponentLink3Description=https://datasheet.ciiva.com/10926/mecf-10926311.pdf?src-supplier=Avnet, ComponentLink3URL=https://datasheet.ciiva.com/10926/mecf-10926311.pdf?src-supplier=Avnet, ComponentLink4Description=https://datasheet.ciiva.com/16666/mecf-16666423.pdf?src-supplier=Avnet+Europe, ComponentLink4URL=https://datasheet.ciiva.com/16666/mecf-16666423.pdf?src-supplier=Avnet+Europe, Contact Material=Bronze, Contact Plating=Gold, Depth=5.59mm, Gender=Male, Housing Material=Polymer, Length=12.7mm, Mount="Surface Mount", Number of Contacts=10, Number of Rows=2, Orientation=Straight, Packaging=Bulk, Pitch=1.27mm, Pricing 2="1=2.98, 45=2.618, 135=2.38, 540=2.023, 1035=1.7255, 5040=1.547 (USD)", Pricing 6="1=4.53000, 10=4.34400, 25=3.98200, 50=3.80100, 100=3.62000, 250=3.16752, 500=3.07700, 1000=2.62450, 2500=2.44350 (USD)", Radiation Hardening=No, REACH SVHC="No SVHC", RoHS=Yes, Stock 2=9740, Stock 6=49, Supplier 1=Samtec, Supplier 2=Digi-Key, Supplier 3=Farnell, Supplier 4=Mouser, Supplier 5=RSComponents, Supplier 6=Digi-Key, Supplier Part Number 1=SHF-105-01-L-D-SM, Supplier Part Number 2=SAM10710-ND, Supplier Part Number 3=1885915, Supplier Part Number 4=200-SHF10501LDSM, Supplier Part Number 5=9011854, Supplier Part Number 6=SAM11496-ND, Termination=Solder
MH1 MH2 MH3 MH4: "Mounting Hole 5.0mm keepout, 3.0mm annualar ring and 2.1mm Drill PTH"
Q2: "Trans MOSFET N-CH Si 60V 0.3A 3-Pin SOT-23 T/R", Case/Package=SOT-23, Continuous Drain Current (ID)=300mA, Drain to Source Breakdown Voltage=60V, Drain to Source Resistance=2R, Gate to Source Voltage (Vgs)=20V, Input Capacitance=30pF, Manufacturer=Vishay, Max Operating Temperature=150°C, Max Power Dissipation=350mW, Min Operating Temperature=-55°C, Package Quantity=1, Supplier Part Number 1=2N7002K-T1-GE3CT-ND, Threshold Voltage=1V, Category=MOSFETs, ComponentLink1Description="Online datasheet", ComponentLink1URL=https://datasheet.ciiva.com/2957/2n7002k-2957216.pdf, Contact Plating=Tin,Matte, Drain to Source Voltage (Vdss)=60V, Element Configuration=Single, Height=1.02mm, Lead Free="Lead Free", Length=3.04mm, Manufacturer Part Number=2N7002K-T1-GE3, Mount="Surface Mount", Nominal Vgs=2V, Number of Channels=1, Number of Elements=1, Number of Pins=3, On-State Resistance=2R, Packaging="Tape and Reel", Power Dissipation=350mW, Pricing 1="1=0.27000, 10=0.21800, 25=0.18200, 100=0.11540, 500=0.07590, 1000=0.05161 (USD)", Pricing 2="100=0.11100 (USD)", Radiation Hardening=No, Rds On Max=2R, REACH SVHC=Unknown, RoHS=Yes, Stock 2=1, Supplier 1=Digi-Key, Supplier 2=RSComponents, Supplier Part Number 2=7879058P, Turn-Off Delay Time=35ns, Turn-On Delay Time=25ns, Voltage=60V, Weight=0.050717oz, Width=1.4mm
R1: library part RC0402FR-071ML, "RES SMD 1M OHM 1% 1/16W 0402", Case Code (Imperial)=0402, Case Code (Metric)=1005, Manufacturer=Yageo, Max Operating Temperature=155°C, Max Power Dissipation=63mW, Min Operating Temperature=-55°C, Resistance=1MR, Resistance Tolerance=1%, Resistor Type="Thick Film", Supplier Part Number 1=311-1.00MLRCT-ND, Temperature Coefficient=100ppm/°C, Voltage Rating=50V, Case/Package=0402, Category="Chip SMD Resistors", Checked By=?, ComponentLink1Description="Online datasheet", ComponentLink1URL=https://datasheet.ciiva.com/11808/0900766b80c66297-11808125.pdf, Construction=Rectangular, Created By="D. Gakure", Depth=0.5mm, Features="Moisture Resistant", Height=0.32mm, Lead Free="Lead Free", Length=1mm, Manufacturer Part Number=RC0402FR-071ML, Military Standard=Not, Number of Terminations=2, Packaging="Tape and Reel", Power Rating=63mW, Pricing 1="1=0.10000, 10=0.01600, 100=0.00640, 1000=0.00286, 2500=0.00248, 5000=0.00205 (USD)", Pricing 2="1=0.10000, 10=0.01200, 50=0.01200, 100=0.00400, 1000=0.00400, 10000=0.00300 (USD)", Pricing 3="10000=0.00290, 50000=0.00200 (GBP)", REACH SVHC=Unknown, RoHS=Yes, RoHS Compliant=Yes, Series=RC, Size Code=0402, Stock 1=7856490, Stock 2=1194490, Stock 3=1530000, Supplier 1=Digi-Key, Supplier 2=Mouser, Supplier 3=Farnell, Supplier Part Number 2=603-RC0402FR-071ML, Supplier Part Number 3=2421892, Technology="THICK FILM", Termination=SMD/SMT, Tolerance=1%
R2: "RES SMD 330K OHM 1% 1/16W 0402", Case Code (Imperial)=0402, Case Code (Metric)=1005, Manufacturer=Yageo, Max Operating Temperature=155°C, Max Power Dissipation=63mW, Min Operating Temperature=-55°C, Package Quantity=1, Resistance=330kR, Resistance Tolerance=1%, Resistor Type="Thick Film", Supplier Part Number 1=311-330KLRCT-ND, Temperature Coefficient=100ppm/°C, Voltage Rating=50V, Case/Package=0402, Category="Chip SMD Resistors", Checked By=?, ComponentLink1Description="Online datasheet", ComponentLink1URL=https://datasheet.ciiva.com/2518/pyu-r-int-thick-7-2518994.pdf?src-supplier=Digi-Key, Construction=Rectangular, Created By="D Gakure", Depth=0.5mm, Features="Moisture Resistant", Height=0.016inch, Lead Free="Lead Free", Length=1mm, Manufacturer Part Number=RC0402FR-07330KL, Military Standard=Not, Number of Terminations=2, Packaging="Tape and Reel", Power Rating=63mW, Pricing 1="1=0.10000, 10=0.01600, 100=0.00660, 1000=0.00299, 2500=0.00259, 5000=0.00214 (USD)", Pricing 2="1=0.10000, 10=0.01400, 50=0.01400, 100=0.00500, 1000=0.00300, 10000=0.00200 (USD)", Pricing 3="10=0.01210, 100=0.00460, 500=0.00410, 2500=0.00310, 5000=0.00280, 10000=0.00250, 50000=0.00180 (GBP)", REACH SVHC=Unknown, RoHS=Yes, RoHS Compliant=Yes, Series=RC, Size Code=0402, Stock 1=78809, Stock 2=218637, Stock 3=310234, Supplier 1=Digi-Key, Supplier 2=Mouser, Supplier 3=Farnell, Supplier Part Number 2=603-RC0402FR-07330KL, Supplier Part Number 3=9239537, Termination=SMD/SMT, Tolerance=1%, Width=0.02inch
R3 R4: "RES SMD 27 OHM 1% 1/16W 0402", Case Code (Imperial)=0402, Case Code (Metric)=1005, Manufacturer=Yageo, Max Operating Temperature=155°C, Max Power Dissipation=63mW, Min Operating Temperature=-55°C, Power Rating=62.5mW, Resistance=27R, Resistance Tolerance=1%, Resistor Type="Thick Film", Supplier Part Number 1=YAG3086CT-ND, Temperature Coefficient=100ppm/°C, Voltage Rating=50V, Case/Package=0402, Category="Chip SMD Resistors", ComponentLink1Description="Online datasheeet", ComponentLink1URL=https://datasheet.ciiva.com/11808/0900766b80c66297-11808450.pdf, Construction=Rectangular, Depth=0.5mm, Features="Moisture Resistant", Height=0.016inch, Lead Free="Lead Free", Length=1mm, Manufacturer Part Number=RC0402FR-0727RL, Military Standard=Not, Number of Terminations=2, Packaging="Tape and Reel", Pricing 1="1=0.10000, 10=0.01600, 100=0.00660, 1000=0.00299, 2500=0.00259, 5000=0.00214 (USD)", Pricing 2="10=0.01720, 100=0.00650, 500=0.00560, 2500=0.00380, 5000=0.00370, 10000=0.00350, 50000=0.00240 (GBP)", Pricing 3="10000=0.00130, 50000=0.00090, 200000=0.00090, 400000=0.00090, 1000000=0.00080 (USD)", REACH SVHC=Unknown, RoHS=Yes, RoHS Compliant=Yes, Series=RC, Size Code=0402, Stock 2=29644, Stock 3=450000, Supplier 1=Digi-Key, Supplier 2=Farnell, Supplier 3="Future Electronics", Supplier Part Number 2=9239049, Supplier Part Number 3=2577120, Technology="THICK FILM", Termination=SMD/SMT, Tolerance=1%, Weight=2.3E-05oz, Width=0.5mm
R5 R13: "RES SMD 150 OHM 1% 1/16W 0402", Case Code (Imperial)=0402, Case Code (Metric)=1005, Manufacturer=Yageo, Max Operating Temperature=155°C, Max Power Dissipation=63mW, Min Operating Temperature=-55°C, Package Quantity=1, Power Rating=62.5mW, Resistance=150R, Resistance Tolerance=1%, Resistor Type="Thick Film", Supplier Part Number 1=311-150LRCT-ND, Temperature Coefficient=100ppm/°C, Voltage Rating=50V, Case/Package=0402, Category="Chip SMD Resistors", Checked By=?, ComponentLink1Description="ine datasheet", ComponentLink1URL=https://datasheet.ciiva.com/11808/0900766b80c66297-11808422.pdf, Construction=Rectangular, Created By="D. Gakure", Depth=0.5mm, Features="Moisture Resistant", Height=0.016inch, Lead Free="Lead Free", Length=1mm, Manufacturer Part Number=RC0402FR-07150RL, Military Standard=Not, Number of Terminations=2, Packaging="Tape and Reel", Pricing 1="1=0.10000, 10=0.01400, 100=0.00580, 1000=0.00260, 2500=0.00226, 5000=0.00186 (USD)", Pricing 2="1=0.10000, 10=0.01200, 50=0.01200, 100=0.00400, 1000=0.00400, 10000=0.00300 (USD)", Pricing 3="10000=0.00270, 50000=0.00200 (GBP)", REACH SVHC="No SVHC", RoHS=Yes, RoHS Compliant=Yes, Series=RC, Stock 1=5214533, Stock 2=582717, Stock 3=880000, Supplier 1=Digi-Key, Supplier 2=Mouser, Supplier 3=Farnell, Supplier Part Number 2=603-RC0402FR-07150RL, Supplier Part Number 3=2421893, Technology="THICK FILM", Termination=SMD/SMT, Tolerance=1%, Width=0.02inch, Working Voltage=50V
R6: "RES SMD 52.3K OHM 1% 1/16W 0402", Case Code (Imperial)=0402, Case Code (Metric)=1005, Manufacturer=Yageo, Max Operating Temperature=155°C, Max Power Dissipation=63mW, Min Operating Temperature=-55°C, Power Rating=62.5mW, Resistance=52.3kR, Resistor Type="Thick Film", Supplier Part Number 1=YAG3179CT-ND, Temperature Coefficient=100ppm/°C, Tolerance=1%, Voltage Rating=50V, Case/Package=0402, Category="Chip SMD Resistors", Checked By=?, ComponentLink1Description="Oline datasheet", ComponentLink1URL=https://datasheet.ciiva.com/16867/pyu-rc0402-51-rohs-l-6-16867930.pdf, Construction=Rectangular, Contact Plating=Tin,Matte, Created By="D. Gakure", Depth=0.5mm, Features="Moisture Resistant", Height=0.016inch, Lead Free="Lead Free", Length=1mm, Manufacturer Part Number=RC0402FR-0752K3L, Military Standard=Not, Number of Terminations=2, Packaging="Tape and Reel", Pricing 1="1=0.10000, 10=0.01600, 100=0.00640, 1000=0.00286, 2500=0.00248, 5000=0.00205 (USD)", Pricing 2="1=0.10000, 10=0.01200, 50=0.01200, 100=0.00400, 1000=0.00300, 10000=0.00300 (USD)", RoHS=Yes, RoHS Compliant=Yes, Series=RC, Size Code=0402, Stock 1=1178310, Stock 2=83620, Supplier 1=Digi-Key, Supplier 2=Mouser, Supplier Part Number 2=603-RC0402FR-0752K3L, Termination=SMD/SMT, Voltage Rating (DC)=50V, Weight=2.3E-05oz, Width=0.02inch
R7: library part RC0402FR-0710KL, "RES SMD 10K OHM 1% 1/16W 0402", Case Code (Imperial)=0402, Case Code (Metric)=1005, Manufacturer=Yageo, Max Operating Temperature=155°C, Min Operating Temperature=-55°C, Power Rating=62.5mW, Resistance=10kR, Resistor Type="Thick Film", Supplier Part Number 1=311-10.0KLRCT-ND, Temperature Coefficient=100ppm/°C, Tolerance=1%, Voltage Rating=50V, Case/Package=0402, Category=Resistors, Checked=?, ComponentLink3Description="Online datasheet", ComponentLink3URL=https://datasheet.ciiva.com/7849/1686128-7849814.pdf, Created=DG, Depth=0.5mm, Height=0.32mm, Lead Free="Lead Free", Lead Pitch=0.2mm, Length=1mm, Manufacturer Part Number=RC0402FR-0710KL, Military Standard=Not, Number of Pins=2, Number of Terminations=2, Packaging="Tape and Reel", Pricing 1="1=0.10000, 10=0.01400, 100=0.00580, 1000=0.00262, 2500=0.00228, 5000=0.00188 (USD)", Pricing 2="1=0.10000, 10=0.01300, 100=0.00400, 1000=0.00300, 2500=0.00300, 10000=0.00200 (USD)", Pricing 3="10000=0.00350 (GBP)", REACH SVHC="No SVHC", RoHS=Yes, Stock 1=40173593, Stock 2=23672167, Stock 3=370000, Supplier 1=Digi-Key, Supplier 2=Mouser, Supplier 3=Farnell, Supplier Part Number 2=603-RC0402FR-0710KL, Supplier Part Number 3=2363463, Termination=SMD/SMT, Voltage Rating (DC)=50V, Width=0.5mm, Working Voltage=50V
R8 R9: "RES SMD 1K OHM 1% 1/16W 0402", Case Code (Imperial)=0402, Case Code (Metric)=1005, Manufacturer=Yageo, Max Operating Temperature=155°C, Min Operating Temperature=-55°C, Power Rating=62.5mW, Resistance=1kR, Resistor Type="Thick Film", Supplier Part Number 1=311-1.00KLRDKR-ND, Temperature Coefficient=100ppm/°C, Tolerance=1%, Voltage Rating=50V, Case/Package=0402, Category=Resistors, Checked=?, ComponentLink2Description="Online datasheet", ComponentLink2URL=https://datasheet.ciiva.com/12666/pyu-rc0402-51-rohs-l-6-r-12666741.pdf, Created=D.G, Depth=0.5mm, Height=0.32mm, Lead Free="Lead Free", Length=1mm, Manufacturer Part Number=RC0402FR-071KL, Military Standard=Not, Number of Pins=2, Packaging="Tape and Reel", Pricing 1="1=0.10000, 10=0.01400, 100=0.00580, 1000=0.00262, 2500=0.00228, 5000=0.00188 (USD)", Pricing 2="1=0.10000, 10=0.01200, 100=0.00400, 1000=0.00400, 2500=0.00400, 10000=0.00300 (USD)", Pricing 3="1=0.08130, 25=0.01210, 100=0.01120, 250=0.01030, 500=0.00900 (GBP)", REACH SVHC=Unknown, RoHS=Yes, Stock 1=37591306, Stock 2=11912978, Stock 3=29900, Supplier 1=Digi-Key, Supplier 2=Mouser, Supplier 3=Farnell, Supplier Part Number 2=603-RC0402FR-071KL, Supplier Part Number 3=2132441, Termination=SMD/SMT, Voltage Rating (DC)=50V, Width=0.5mm
R10 R15: "RES SMD 5.1K OHM 5% 1/16W 0402", Case Code (Imperial)=0402, Case Code (Metric)=1005, Manufacturer=Yageo, Max Operating Temperature=155°C, Max Power Dissipation=63mW, Min Operating Temperature=-55°C, Power Rating=62.5mW, Resistance=5.1kR, Resistance Tolerance=5%, Resistor Type="Thick Film", Supplier Part Number 1=311-5.1KJRCT-ND, Temperature Coefficient=100ppm/°C, Voltage Rating=50V, Case/Package=0402, Category="Chip SMD Resistors", Checked By=?, ComponentLink2Description="Onnline datasheet", ComponentLink2URL=https://datasheet.ciiva.com/16740/pyu-rc0402-51-rohs-l-6-r-16740925.pdf, Construction=Rectangular, Created By="D. Gakure", Depth=0.5mm, Features="Moisture Resistant", Height=0.35mm, Lead Free="Lead Free", Length=1mm, Manufacturer Part Number=RC0402JR-075K1L, Military Standard=Not, Number of Terminations=2, Packaging="Tape and Reel", Pricing 1="1=0.10000, 10=0.01300, 100=0.00520, 1000=0.00233, 2500=0.00202, 5000=0.00167 (USD)", Pricing 2="1=0.10000, 25=0.01000, 100=0.00400, 250=0.00400, 500=0.00300, 1000=0.00300 (USD)", Pricing 3="1=0.10000, 10=0.01000, 50=0.01000, 100=0.00400, 1000=0.00300, 10000=0.00200 (USD)", Pricing 4="10=0.00910, 100=0.00390, 500=0.00320, 2500=0.00240, 5000=0.00210, 10000=0.00190, 50000=0.00150 (GBP)", Pricing 5="10000=0.00270 (GBP)", REACH SVHC="No SVHC", RoHS=Yes, RoHS Compliant=Yes, Series=RC, Size Code=0402, Stock 1=1270619, Stock 2=1265, Stock 3=100817, Stock 4=68890, Stock 5=1265, Supplier 1=Digi-Key, Supplier 2=Newark, Supplier 3=Mouser, Supplier 4=Farnell, Supplier 5=Farnell, Supplier Part Number 2=68R0016, Supplier Part Number 3=603-RC0402JR-075K1L, Supplier Part Number 4=3495714, Supplier Part Number 5=1799293, Termination=SMD/SMT, Tolerance=5%, Voltage Rating (DC)=50V, Weight=2.3E-05oz, Width=0.5mm
R11 R12: "RES SMD 30 OHM 1% 1/16W 0402", Case Code (Imperial)=0402, Case Code (Metric)=1005, Manufacturer=Yageo, Max Operating Temperature=155°C, Max Power Dissipation=63mW, Min Operating Temperature=-55°C, Resistance=30R, Resistance Tolerance=1%, Resistor Type="Thick Film", Supplier Part Number 1=311-30LRCT-ND, Temperature Coefficient=100ppm/°C, Voltage Rating=50V, Case/Package=0402, Category="Chip SMD Resistors", Checked By=?, ComponentLink1Description="Online datasheet", ComponentLink1URL=https://datasheet.ciiva.com/7849/1018594-7849958.pdf, Construction=Rectangular, Contact Plating=Tin,Matte, Created By="D. Gakure", Depth=0.5mm, Features="Moisture Resistant", Height=0.35mm, Lead Free="Lead Free", Length=1mm, Manufacturer Part Number=RC0402FR-0730RL, Military Standard=Not, Number of Terminations=2, Packaging="Tape and Reel", Power Rating=63mW, Pricing 1="1=0.10000, 10=0.01400, 100=0.00580, 1000=0.00260, 2500=0.00226, 5000=0.00186 (USD)", Pricing 2="1=0.10000, 10=0.01200, 50=0.01200, 100=0.00400, 1000=0.00400, 10000=0.00300 (USD)", Pricing 3="10=0.01210, 100=0.00420, 500=0.00370, 2500=0.00280, 5000=0.00250, 10000=0.00230, 50000=0.00150 (GBP)", REACH SVHC=Unknown, RoHS=Yes, RoHS Compliant=Yes, Series=RC, Size Code=0402, Stock 1=2973, Stock 2=41804, Stock 3=4422, Supplier 1=Digi-Key, Supplier 2=Mouser, Supplier 3=Farnell, Supplier Part Number 2=603-RC0402FR-0730RL, Supplier Part Number 3=1458775, Termination=SMD/SMT, Tolerance=1%, Voltage Rating (DC)=50V, Width=0.5mm
R14: "RES SMD 220 OHM 1% 1/16W 0402", Case Code (Imperial)=0402, Case Code (Metric)=1005, Manufacturer=Yageo, Max Operating Temperature=155°C, Max Power Dissipation=63mW, Min Operating Temperature=-55°C, Package Quantity=1, Power Rating=62.5mW, Resistance=220R, Resistor Type="Thick Film", Supplier Part Number 1=311-220LRCT-ND, Temperature Coefficient=100ppm/°C, Tolerance=1%, Voltage Rating=50V, Case/Package=0402, Category=Resistors, Checked=?, ComponentLink1Description=https://datasheet.ciiva.com/11819/0900766b80c66297-11819466.pdf?src-supplier=RSComponents, ComponentLink1URL=https://datasheet.ciiva.com/11819/0900766b80c66297-11819466.pdf?src-supplier=RSComponents, ComponentLink2Description=https://datasheet.ciiva.com/2453/pyu-r-int-thick-7-2453460.pdf?src-supplier=Digi-Key, ComponentLink2URL=https://datasheet.ciiva.com/2453/pyu-r-int-thick-7-2453460.pdf?src-supplier=Digi-Key, ComponentLink3Description=https://datasheet.ciiva.com/2453/pyu-r-int-thick-7-2453461.pdf?src-supplier=Digi-Key, ComponentLink3URL=https://datasheet.ciiva.com/2453/pyu-r-int-thick-7-2453461.pdf?src-supplier=Digi-Key, ComponentLink4Description=https://datasheet.ciiva.com/2453/pyu-r-int-thick-7-2453462.pdf?src-supplier=Digi-Key, ComponentLink4URL=https://datasheet.ciiva.com/2453/pyu-r-int-thick-7-2453462.pdf?src-supplier=Digi-Key, ComponentLink5Description=https://datasheet.ciiva.com/16746/pyu-rc0402-51-rohs-l-6-r-16746831.pdf?src-supplier=Future+Electronics, ComponentLink5URL=https://datasheet.ciiva.com/16746/pyu-rc0402-51-rohs-l-6-r-16746831.pdf?src-supplier=Future+Electronics, Created=D.G, Depth=0.5mm, Features="Moisture Resistant", Height=0.016inch, Lead Free="Lead Free", Length=1mm, Manufacturer Part Number=RC0402FR-07220RL, Military Standard=Not, Number of Pins=2, Number of Terminations=2, Packaging="Tape and Reel", Pricing 1="1=0.10000, 10=0.01400, 100=0.00580, 1000=0.00262, 2500=0.00228, 5000=0.00188 (USD)", Pricing 2="1=0.10000, 10=0.01200, 100=0.00400, 1000=0.00400, 2500=0.00400, 10000=0.00300 (USD)", Pricing 3="1=0.08130, 25=0.01210, 100=0.01120, 250=0.01030, 500=0.00900 (GBP)", REACH SVHC="No SVHC", RoHS=Yes, Stock 1=1286042, Stock 2=324625, Stock 3=18234, Supplier 1=Digi-Key, Supplier 2=Mouser, Supplier 3=Farnell, Supplier Part Number 2=603-RC0402FR-07220RL, Supplier Part Number 3=2147864, Termination=SMD/SMT, Voltage Rating (DC)=50V, Width=0.02inch
SW1 SW2: "SWITCH TACTILE SSPST 50mA @ 12VDC", Current Rating="50 mA", Manufacturer=USAKRO, Operating Force="3.9 N", Supplier 1 Part Number=C493283, Voltage Rating DC="12 VDC", Actuator=Oval, ComponentLink1Description="Online datasheet", ComponentLink1URL=https://datasheet.ciiva.com/18514/pts810-4mar13-18514167.pdf, Contact Form=SPST, Manufacturer Part Number=UK-B0267-SP25Y, Mounting Style=SMD/SMT, Product Category="Tactile Switches", RoHS=Details, Supplier 1=LCSC, Switch Function="OFF - (ON)"
U1: "6V 260mV @ 200mA(typ) - - Fixed 3.3V SOT-23-5 Linear Voltage Regulators (LDO) ROHS", Case/Package=SOT-23-5, Dropout Voltage=200mV, Manufacturer="MICRONE(Nanjing Micro One Elec)", Max Input Voltage=6, Min Output Voltage=3.3V, Output Current=500mA, Supplier Part Number=C82942, Category="Voltage Regulators - Linear", Checked=?, ComponentLink3Description="On Semi datasheet online", ComponentLink3URL=https://datasheet.lcsc.com/lcsc/1811131510_MICRONE-Nanjing-Micro-One-Elec-ME6211C33M5G-N_C82942.pdf, Created=DG, Manufacturer Part Number=ME6211C33M5G-N, Mount="Surface Mount", Number of Regulators=1, Output Configuration=Positive, Output Type=Fixed, Pricing 1="1=0.33000, 10=0.24900, 25=0.21760, 100=0.12440, 250=0.11664, 500=0.09330, 1000=0.07153 (USD)", Stock 1=32529, Supplier 1=LCSC
U2: "IC PWR SWITCH N-CHAN 1:1 SOT23-6", Case/Package=SOT-23, Manufacturer="Texas Instruments", Max Input Voltage=6.5V, Max Operating Temperature=85°C, Max Power Dissipation=625mW, Min Input Voltage=2.5V, Min Operating Temperature=-40°C, On-State Resistance=85mR, Output Current=1.5A, Package Quantity=1, Supplier Part Number 1=296-32464-1-ND, Category="Hot Swap Controllers", ComponentLink1Description="Online datasheet", ComponentLink1URL=https://datasheet.ciiva.com/15108/getdatasheetpartid-297517-15108509.pdf, Lead Free="Lead Free", Manufacturer Part Number=TPS2553DBVR, Max Supply Voltage=6.5V, Min Supply Voltage=2.5V, Number of Outputs=1, Number of Pins=6, Packaging="Tape and Reel", Pricing 1="1=1.20000, 10=1.07100, 25=1.01640, 100=0.78050, 250=0.68972, 500=0.65340, 1000=0.50820 (USD)", Radiation Hardening=No, REACH SVHC="No SVHC", RoHS=Yes, Stock 1=14713, Supplier 1=Digi-Key, Supplier 2=Farnell, Supplier 3=Mouser, Supplier Part Number 2=3124082, Supplier Part Number 3=595-TPS2553DBVR, Weight=0.00127oz
U3: "QFN-56_7x7 MCU", Manufacturer="Raspberry Pi", Supplier 1 Part Number=C2040, Category="Integrated Circuit", ComponentLink1Description="Online datasheet", ComponentLink1URL=https://datasheet.lcsc.com/lcsc/2108101830_Raspberry-Pi-RP2040_C2040.pdf, Manufacturer Part Number=RP2040, Supplier 1=LCSC